# Altium PCB TPS65130-PCB.pcbdoc
Units mil, origin at the board's own origin, x right, y up, seen from the top; angles counter-clockwise.
Board outline not stored, 2 copper layers (Top Layer, Bottom Layer); 21 components, 0 nets, 66 pads, 0 vias.
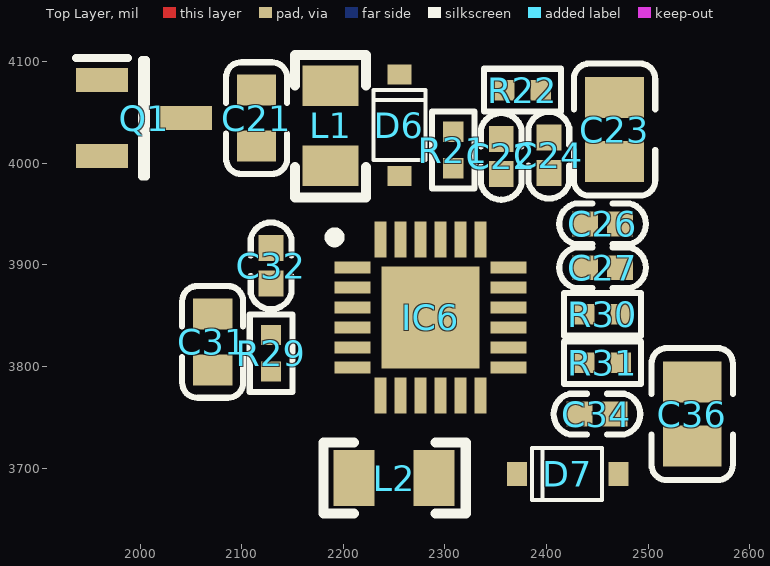
[diagram p0: Top Layer view]
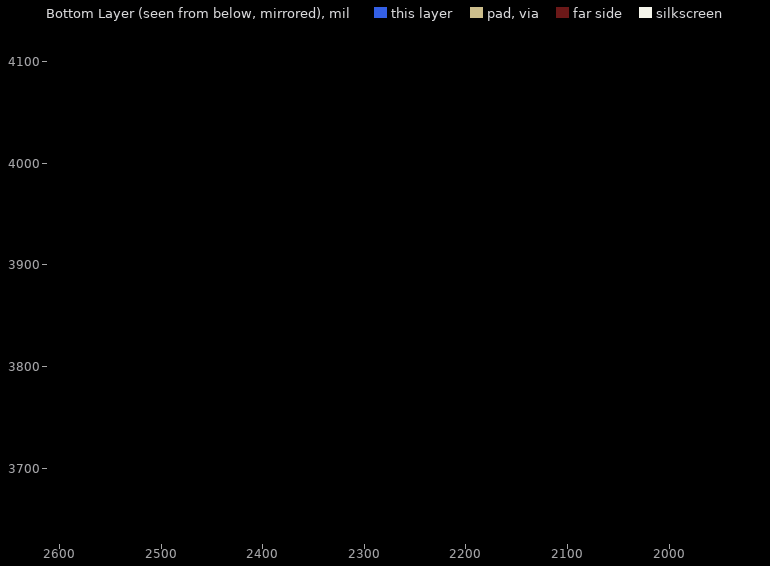
[diagram p1: Bottom Layer view, seen from below]

## Layer stack, top to bottom
Top Solder: solder mask 0.4, Solder Resist, Dk 3.5
Top Layer: signal copper 1.4
Dielectric 1: dielectric 12.6, FR-4, Dk 4.8
Bottom Layer: signal copper 1.4
Bottom Solder: solder mask 0.4, Solder Resist, Dk 3.5

## Components (designator, comment, footprint, x,y, rotation, side; value= is the part's Value field where it differs from the comment)
C21 "4.7uF 16V" 0603C 2114.72,4044.57 r90 top
C22 "6.8pF 50V" 0402C 2355.54,4006.78 r90 top
C23 "22uF 25V" 0805C 2467.09,4033.24 r270 top
C24 "10nF 50V" 0402C 2402.46,4008.04 r270 top
C26 "4.7nF 50V" 0402C 2455.28,3940.46 r180 top
C27 "220nF 16V" 0402C 2455.28,3897.25 r0 top
C31 "4.7uF 16V" 0603C 2071.52,3824.27 r270 top
C32 "100nF 16V" 0402C 2128.97,3899.2 r90 top
C34 "7.5pF 50V" 0402C 2449.76,3753.23 r0 top
C36 "22uF 25V" 0805C 2543.5,3753.23 r90 top
D6 "B5817WS SJ" SOD-323 2255.31,3987.4 r90 top
D7 "B5817WS SJ" SOD-323 2471.02,3694.17 r180 top
IC6 "TPS65130RGET" QFN50P400X400X100-25N 2285.98,3848.5 r0 top
L1 "4.7uH 700mA" 0805L 2187.56,4076.57 r270 top
L2 "4.7uH 700mA" 0805L 2210.67,3690.24 r0 top
Q1 "SI2323DS-T1-GE3" SOT95P237X112-3N 2004.09,4044.49 r0 top
R21 "1M" 0402R 2308.29,4013.07 r90 top
R22 "130k" 0402R 2376.54,4072.13 r180 top
R29 "100R" 0402R 2128.97,3813.15 r90 top
R30 "121.2K" 0402R 2455.28,3851.35 r0 top
R31 "1M" 0402R 2455.28,3803.78 r0 top

## Footprints (in the part's own frame and the unit in brackets; to place one, negate y for a bottom-side part, rotate by r counter-clockwise, add the part's x,y. Pads: shape width x height; smd on the part's side, far side on the other; paste and mask are expansions set on the pad)
0402C [mm]
  rect 0.65x0.62 smd: 1(-0.44,0) 2(0.44,0)
  silkscreen extent -1.08,-0.51 1.08,0.51, body extent -0.51,-0.25 0.49,0.25, height 0.55
0402R [mil]
  rect 20x20 smd: 1(-18,0) 2(18,0)
  silkscreen extent -38,-21 38,21, body extent -20,-11 20,11, height 16
0603C [mm]
  rect 0.78x0.98 smd: 1(-0.7,0) 2(0.7,0)
  silkscreen extent -1.4,-0.76 1.4,0.76, body extent -0.8,-0.4 0.8,0.4, height 0.87
0805C [mm]
  rect 1.02x1.47 smd: 1(-0.8,0) 2(0.8,0)
  silkscreen extent -1.65,-1.02 1.65,1.02, body extent -1,-0.62 1,0.63, height 0.88
0805L [mil] "小功率贴片电感"
  rect 40x55 smd: 1(0,0) 2(78.74,0)
  silkscreen extent -30,-35 110,35, body extent 1,-25 79,22, height 35
QFN50P400X400X100-25N [mm]
  rect 0.9x0.3 smd: 1(-1.95,1.25) 2(-1.95,0.75) 3(-1.95,0.25) 4(-1.95,-0.25) 5(-1.95,-0.75) 6(-1.95,-1.25) 13(1.95,-1.25) 14(1.95,-0.75) 15(1.95,-0.25) 16(1.95,0.25) 17(1.95,0.75) 18(1.95,1.25)
  rect 0.3x0.9 smd: 7(-1.25,-1.95) 8(-0.75,-1.95) 9(-0.25,-1.95) 10(0.25,-1.95) 11(0.75,-1.95) 12(1.25,-1.95) 19(1.25,1.95) 20(0.75,1.95) 21(0.25,1.95) 22(-0.25,1.95) 23(-0.75,1.95) 24(-1.25,1.95)
  rect 2.45x2.55 smd: 25(0,0)
  silkscreen extent -2.52,1.88 -2.27,2.12, body extent -2.05,-2.05 2.05,2.05, height 1
SOD-323 [mm] "塑封二极管"
  rect 0.5x0.6 smd: A(0,0) K(2.54,0)
  silkscreen extent 0.41,-0.65 2.16,0.65, body extent 0.02,-0.64 2.52,0.62, height 0.9
SOT95P237X112-3N [mm]
  rect 1.3x0.6 smd: 1(-1.05,0.95) 2(-1.05,-0.95) 3(1.05,0)
  silkscreen extent -1.7,-1.46 0.05,1.5, body extent -1.18,-1.46 1.18,1.46, height 1.12

## Part data
C21 C22 C23 C24 C26 C27 C31 C34 C36: library part CAP-NP
C32: library part CAP-NP, Capacitance=100nF, Case/Package=0402, Case Code (Metric)=1005, Dielectric=X7R, Manufacturer 1=Samsung, Manufacturer Part Number 1=CL05B104KO5NNNC, Max Operating Temperature=125°C, Min Operating Temperature=-55°C, Package Quantity=1, Supplier Part Number 1=C1525, Tolerance=10%, Voltage=16V, Case Code (Imperial)=0402, ComponentLink1Description=http://www1.futureelectronics.com/doc/SAMSUNG%20PASSIVE/CL05B104KQ5NNNC.pdf?src-supplier=Future+Electronics, ComponentLink1URL=http://www1.futureelectronics.com/doc/SAMSUNG%20PASSIVE/CL05B104KQ5NNNC.pdf?src-supplier=Future+Electronics, ComponentLink2Description=https://www.verical.com/server-webapp/html/getDatasheet?partID=359683&src-supplier=Verical, ComponentLink2URL=https://www.verical.com/server-webapp/html/getDatasheet?partID=359683&src-supplier=Verical, ComponentLink3Description=https://www.distrelec.biz/Web/Downloads/_e/ng/MLCC_CatalogDownload2013_ENG.pdf?mime=application%2Fpdf&src-supplier=Distrelec, ComponentLink3URL=https://www.distrelec.biz/Web/Downloads/_e/ng/MLCC_CatalogDownload2013_ENG.pdf?mime=application%2Fpdf&src-supplier=Distrelec, ComponentLink4Description=https://produktinfo.conrad.com/datenblaetter/450000-474999/458718-da-01-en-VS_KONDENSATOR_0402.pdf?src-supplier=Conrad, ComponentLink4URL=https://produktinfo.conrad.com/datenblaetter/450000-474999/458718-da-01-en-VS_KONDENSATOR_0402.pdf?src-supplier=Conrad, Contact Plating=Tin, Depth=0.5mm, Description 1="CAP CER 0.1UF 16V X7R 0402", Height 1=0.5mm, Lead Free="Lead Free", Length=1mm, Material=Ceramic, Mount="Surface Mount", Packaging="Tape and Reel", Pricing 1="100=0.0023, 1000=0.002, 3000=0.0018, 10000=0.0017, 50000=0.0017, 100000=0.0017, 100=0.0021, 1000=0.0018, 3000=0.0017, 10000=0.0016, 50000=0.0016, 100000=0.0016, 100=0.0107, 1000=0.0094, 3000=0.0087, 10000=0.008, 50000=0.008, 100000=0.008, 100=0.0102, 1000=0.0089, 3000=0.0083, 10000=0.0077, 50000=0.0077, 100000=0.0077, 100=0.0014, 1000=0.0012, 3000=0.0011, 10000=0.001, 50000=0.001, 100000=0.001, 100=0.0012, 1000=0.0011, 3000=0.001, 10000=0.0009, 50000=0.0009, 100000=0.0009, 100=0.0124, 1000=0.0109, 3000=0.0101, 10000=0.0093, 50000=0.0093, 100000=0.0093, 100=0.1676, 1000=0.1466, 3000=0.1361, 10000=0.1257, 50000=0.1257, 100000=0.1257, 100=0.0066, 1000=0.0058, 3000=0.0054, 10000=0.005, 50000=0.005, 100000=0.005, 100=0.1289, 1000=0.1128, 3000=0.1048, 10000=0.0967, 50000=0.0967, 100000=0.0967, 100=0.0142, 1000=0.0125, 3000=0.0116, 10000=0.0107, 50000=0.0107, 100000=0.0107, 100=0.0022, 1000=0.0019, 3000=0.0018, 10000=0.0016, 50000=0.0016, 100000=0.0016, 100=0.0016, 1000=0.0014, 3000=0.0013, 10000=0.0012, 50000=0.0012, 100000=0.0012 (AUD)", Radiation Hardening=No, Stock 1=5012200, Supplier 1=LCSC, Thickness=0.022inch, Voltage Rating=16V, Voltage Rating (DC)=16V, Width=0.02inch
D6 D7: library part "DIODE SCHOTTKY", "肖特基二极管"
IC6: library part TPS65131RGET, "DC/DC 芯片", Manufacturer_Name="Texas Instruments", Mouser Part Number=595-TPS65131RGET, Arrow Part Number=TPS65130RGET, Arrow Price/Stock=https://www.arrow.com/en/products/tps65131rget/texas-instruments, Datasheet Link=http://www.ti.com/lit/ds/symlink/tps65130.pdf, Height=1mm, Manufacturer_Part_Number=TPS65131RGET, Mouser Price/Stock=https://www.mouser.co.uk/ProductDetail/Texas-Instruments/TPS65131RGET?qs=Gse6rAGbi7%2FStiVl23F5Fg%3D%3D
L1 L2: library part INDUCTOR, "MLP2012S4R7MT0S1"
Q1: "MOSFET (P-Channel)", Manufacturer_Name=Vishay, Mouser Part Number=781-SI2323DS-T1-GE3, Arrow Part Number=SI2323DS-T1-GE3, Arrow Price/Stock=https://www.arrow.com/en/products/si2323ds-t1-ge3/vishay, Datasheet Link=https://mouser.componentsearchengine.com/Datasheets/2/SI2323DS-T1-GE3.pdf, Height=1.12mm, Manufacturer_Part_Number=SI2323DS-T1-GE3, Mouser Price/Stock=https://www.mouser.co.uk/ProductDetail/Vishay-Semiconductors/SI2323DS-T1-GE3?qs=IRuQNBqMOcnPRxUlCX6ywQ%3D%3D
R21 R22 R29 R30 R31: library part RES

## Nets (pads, with @x,y where several pads share a name; then routed paths per layer and width w, separated by ;. In a path a pad name is that pad's centre, name@x,y a point inside that pad or via, vN(x,y) a via of type N, cw(c..) or ccw(c..) an arc to the next point about the centre after c; other vN are vias at no path point)
pads on no net: C21.1 C21.2 C22.1 C22.2 C23.1 C23.2 C24.1 C24.2 C26.1 C26.2 C27.1 C27.2 C31.1 C31.2 C32.1 C32.2 C34.1 C34.2 C36.1 C36.2 D6.A D6.K D7.A D7.K IC6.1 IC6.2 IC6.3 IC6.4 IC6.5 IC6.6 IC6.7 IC6.8 IC6.9 IC6.10 IC6.11 IC6.12 IC6.13 IC6.14 IC6.15 IC6.16 IC6.17 IC6.18 IC6.19 IC6.20 IC6.21 IC6.22 IC6.23 IC6.24 IC6.25 L1.1 L1.2 L2.1 L2.2 Q1.1 Q1.2 Q1.3 R21.1 R21.2 R22.1 R22.2 R29.1 R29.2 R30.1 R30.2 R31.1 R31.2